# Altium PCB Odrive.PcbDoc (part 2 of 4)
Units mil, origin at the board's own origin, x right, y up, seen from the top; angles counter-clockwise.
Board outline 2874.02 x 1968.5 mil, 4 copper layers (Top Layer, Power, Signal, Bottom Layer), stack 74.892 mil thick; 198 components, 162 nets, 717 pads, 948 vias.
Unrouted connection lines stored in the file: 81.
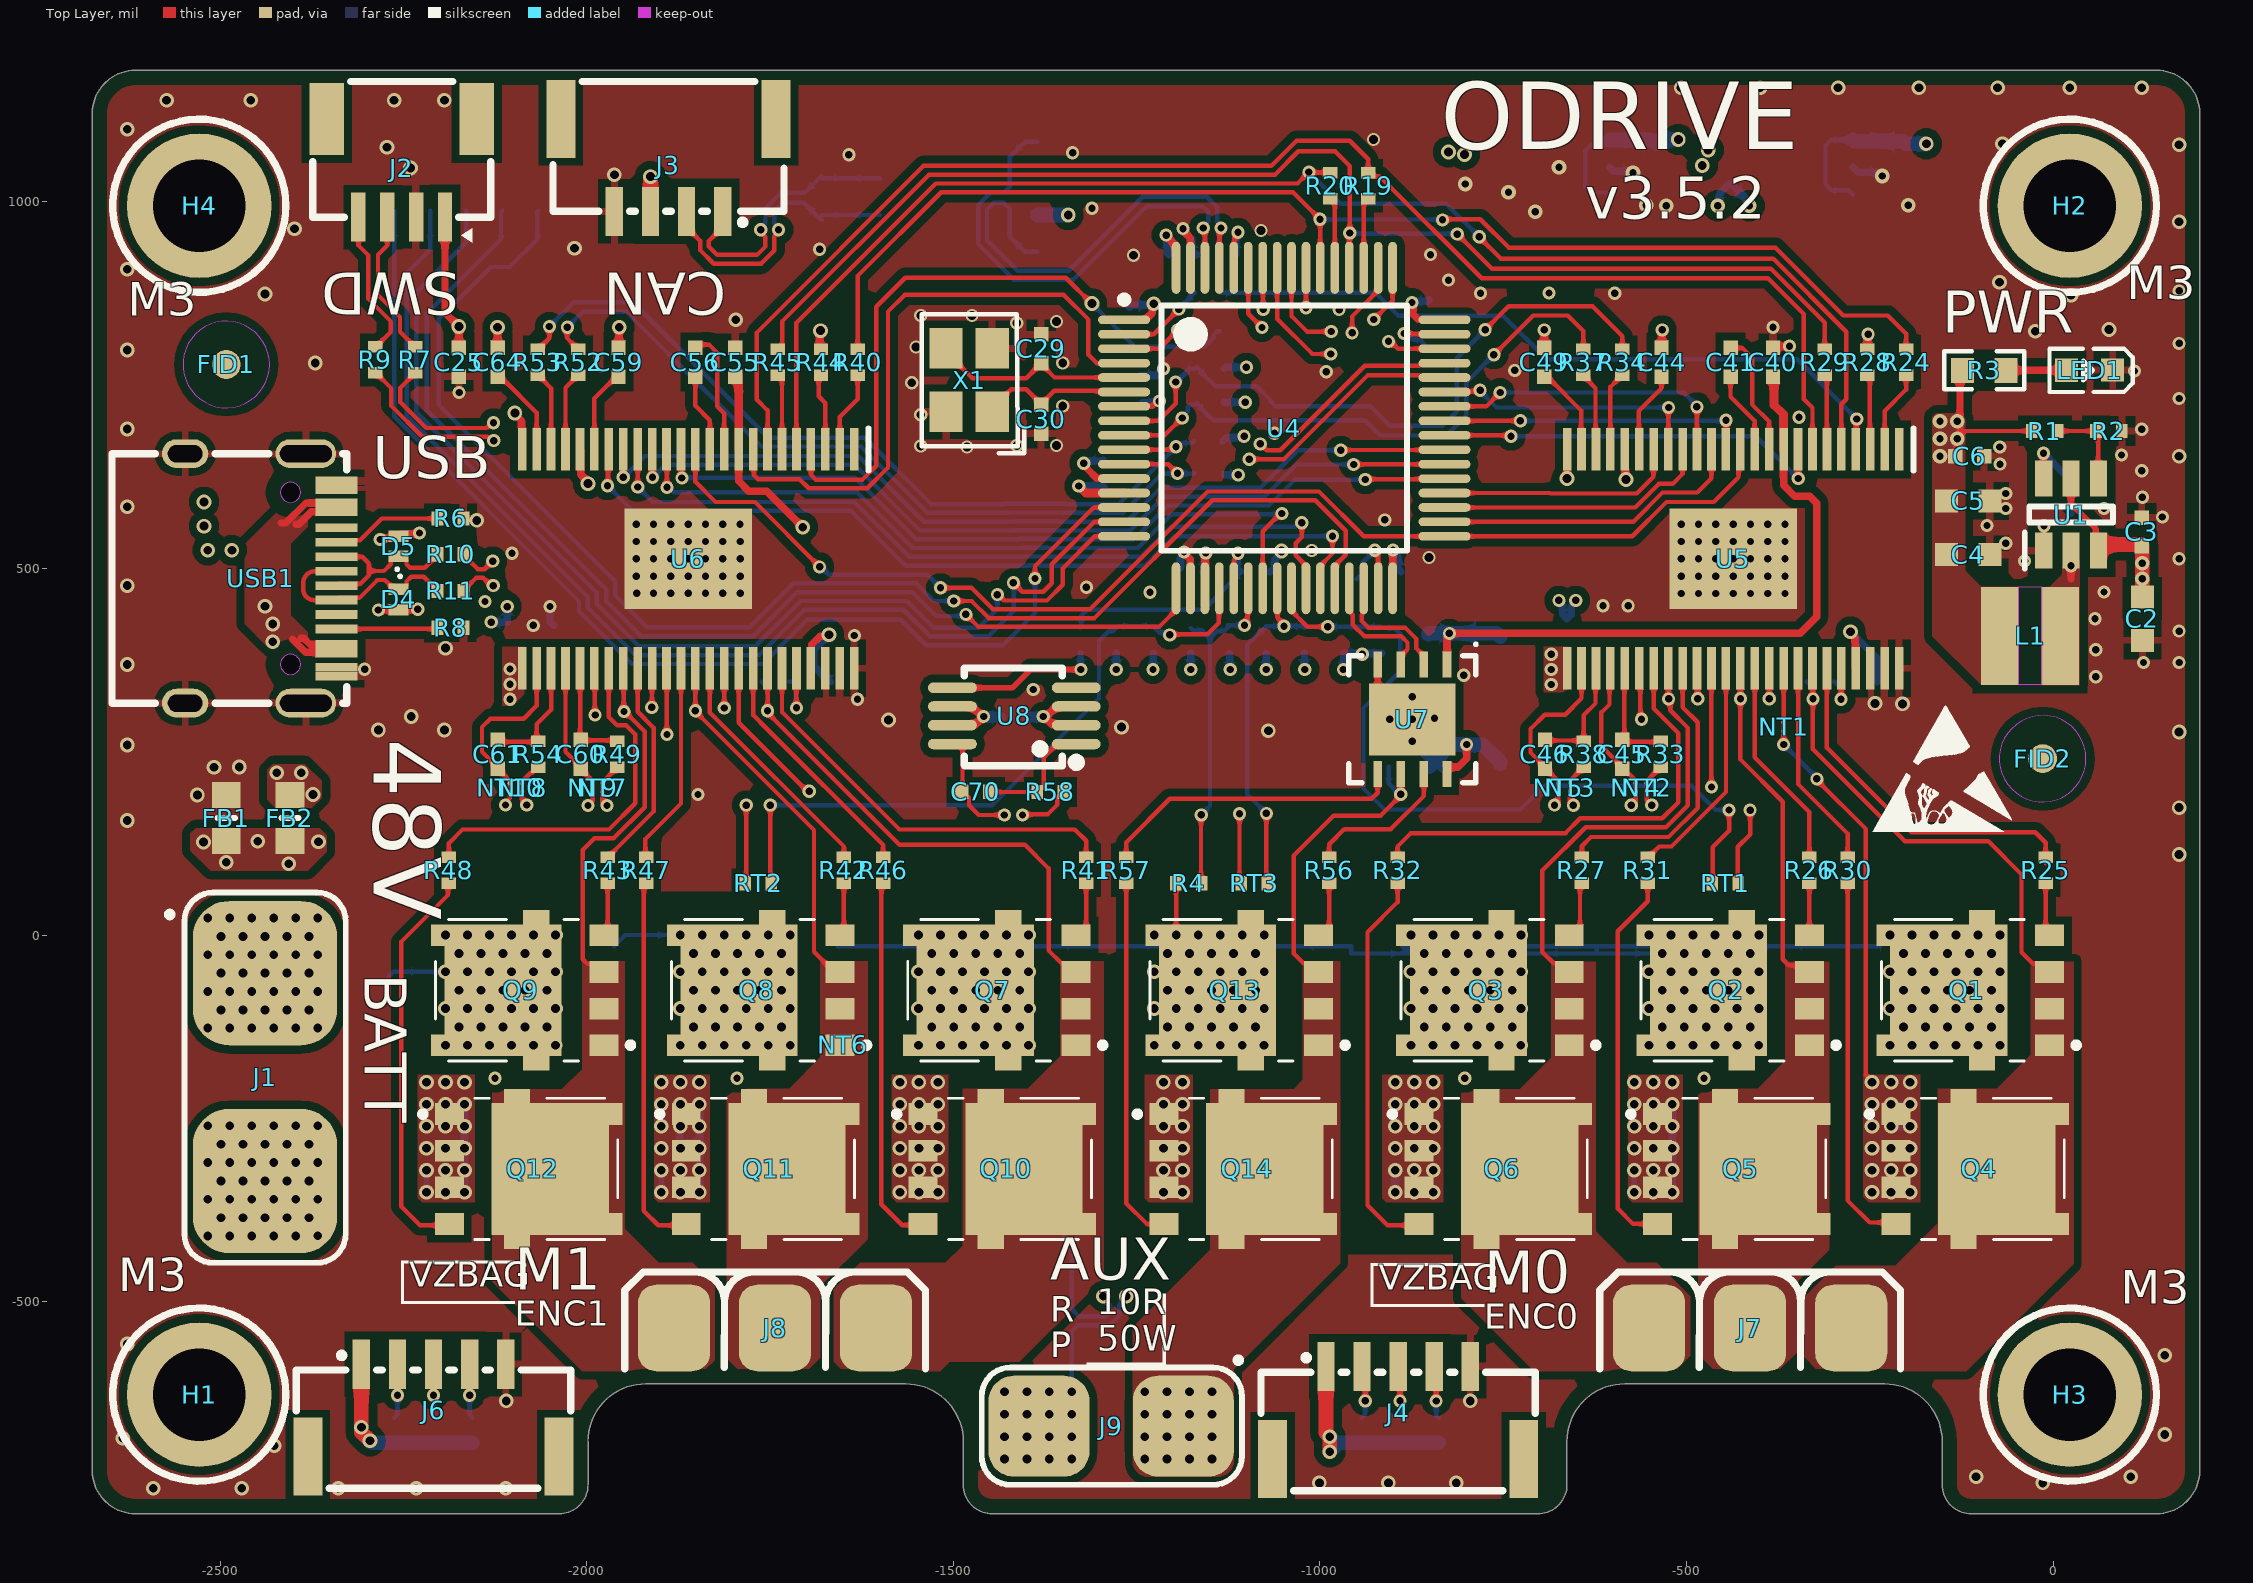
[diagram p0: Top Layer view]

## Via types
v1: diameter 20, hole 12, Top Layer to Bottom Layer, tented both sides, 616 vias
v2: diameter 18, hole 10, Top Layer to Bottom Layer, tented both sides, 296 vias
v3: diameter 18, hole 12, Top Layer to Bottom Layer, tented both sides, 18 vias
v4: diameter 20, hole 10, Top Layer to Bottom Layer, tented both sides, 18 vias

## Nets (pads, with @x,y where several pads share a name; then routed paths per layer and width w, separated by ;. In a path a pad name is that pad's centre, name@x,y a point inside that pad or via, vN(x,y) a via of type N, cw(c..) or ccw(c..) an arc to the next point about the centre after c; other vN are vias at no path point) (continued)
CAN_P: J3.1 R61.2 U9.7 | length 376.5
  Top Layer w6: J3.1@-1814.57,987.13 -1814.57,965.48 -1833.33,946.72 -1833.33,939.27 -1821.85,927.78 -1767.63,927.78 -1756.23,939.18 -1756.23,952.27 -1762.67,958.71 v2(-1762.67,961.96)
  Bottom Layer w6: v2(-1762.67,961.96) -1762.67,964.88 -1756.08,971.47 -1756.08,991.52 -1735.26,1012.33 -1702.8,1012.33 -1680.28,1034.84 R61.2@-1679.15,1034.84 -1679.15,1032.36 -1678.98,1032.18 U9.7@-1599.99,1032.18
EN_GATE: U4.33 U5.12 U6.12 | length 1701.9
  Top Layer w6: U6.12@-1851.7,662.44 -1851.7,618.26 -1824.25,590.81 -1770.57,590.81 -1682.32,502.56 v2(-1682.32,502.3) ; v2(-1517.45,473.71) -1475.22,473.71 -1445.98,444.47 -1313.55,444.47 -1152.95,605.06 -1001.29,605.06 -940.21,543.98 U4.33@-830.07,543.98 -574.11,543.98 -527.28,590.81 -462.78,590.81 -429.19,624.4 -429.19,659.95 U5.12@-427.47,661.67
  Bottom Layer w6: v2(-1682.32,502.3) -1680.17,502.3 -1669.69,491.82 -1535.56,491.82 v2(-1517.45,473.71)
GH_A: R25.1 U5.43 | length 488.3
  Top Layer w6: U5.43@-308.59,364.17 -308.59,255.54 -193.41,140.37 -24.47,140.37 -10.32,126.21 R25.1@-10.32,98.4
GH_A_nP: R41.2 U6.43 | length 574.9
  Top Layer w6: U6.43@-1733.59,364.17 -1733.59,304.25 -1573.48,144.14 -1334.21,144.14 -1318.84,128.78 R41.2@-1318.84,101.24
GH_B: R26.1 U5.38 | length 289.6
  Top Layer w6: U5.38@-407.02,364.17 -407.02,242.44 -332.6,168.03 R26.1@-332.6,105.38
GH_B_nP: R42.2 U6.38 | length 339.1
  Top Layer w6: U6.38@-1832.02,364.17 -1832.02,303.63 -1649.2,120.82 R42.2@-1649.2,100.79
GH_C: R27.1 U5.33 | length 394.7
  Top Layer w6: R27.1@-642.87,105.38 -642.87,121.4 -630.33,133.93 -524.59,133.93 -484.9,173.62 -484.9,290.45 -505.44,310.99 U5.33@-505.44,364.17
GH_C_nP: R43.2 U6.33 | length 293.8
  Top Layer w6: R43.2@-1971.5,105.38 -1971.5,105.89 -1908.69,168.7 -1908.69,282.82 -1930.44,304.58 U6.33@-1930.44,364.17
GL_A: R30.1 U5.41 | length 286.8
  Top Layer w6: U5.41@-347.96,364.17 -347.96,206.23 -280.43,138.7 R30.1@-280.43,105.38
GL_A_nP: R46.2 U6.41 | length 332.2
  Top Layer w6: U6.41@-1772.96,364.17 -1772.96,300.22 -1754.45,281.71 -1595.66,122.92 R46.2@-1595.66,105.38
GL_B: R31.1 U5.36 | length 312.9
  Top Layer w6: R31.1@-552.98,105.38 -537.4,120.96 -520.59,120.96 -446.22,195.34 -446.22,364 U5.36@-446.39,364.17
GL_B_nP: R47.2 U6.36 | length 279.3
  Top Layer w6: R47.2@-1918.87,105.38 -1919.87,106.38 -1919.87,131.21 -1871.39,179.69 U6.36@-1871.39,364.17